# EAGLE board Power (EAGLE 8.4.1), part 1 of 2
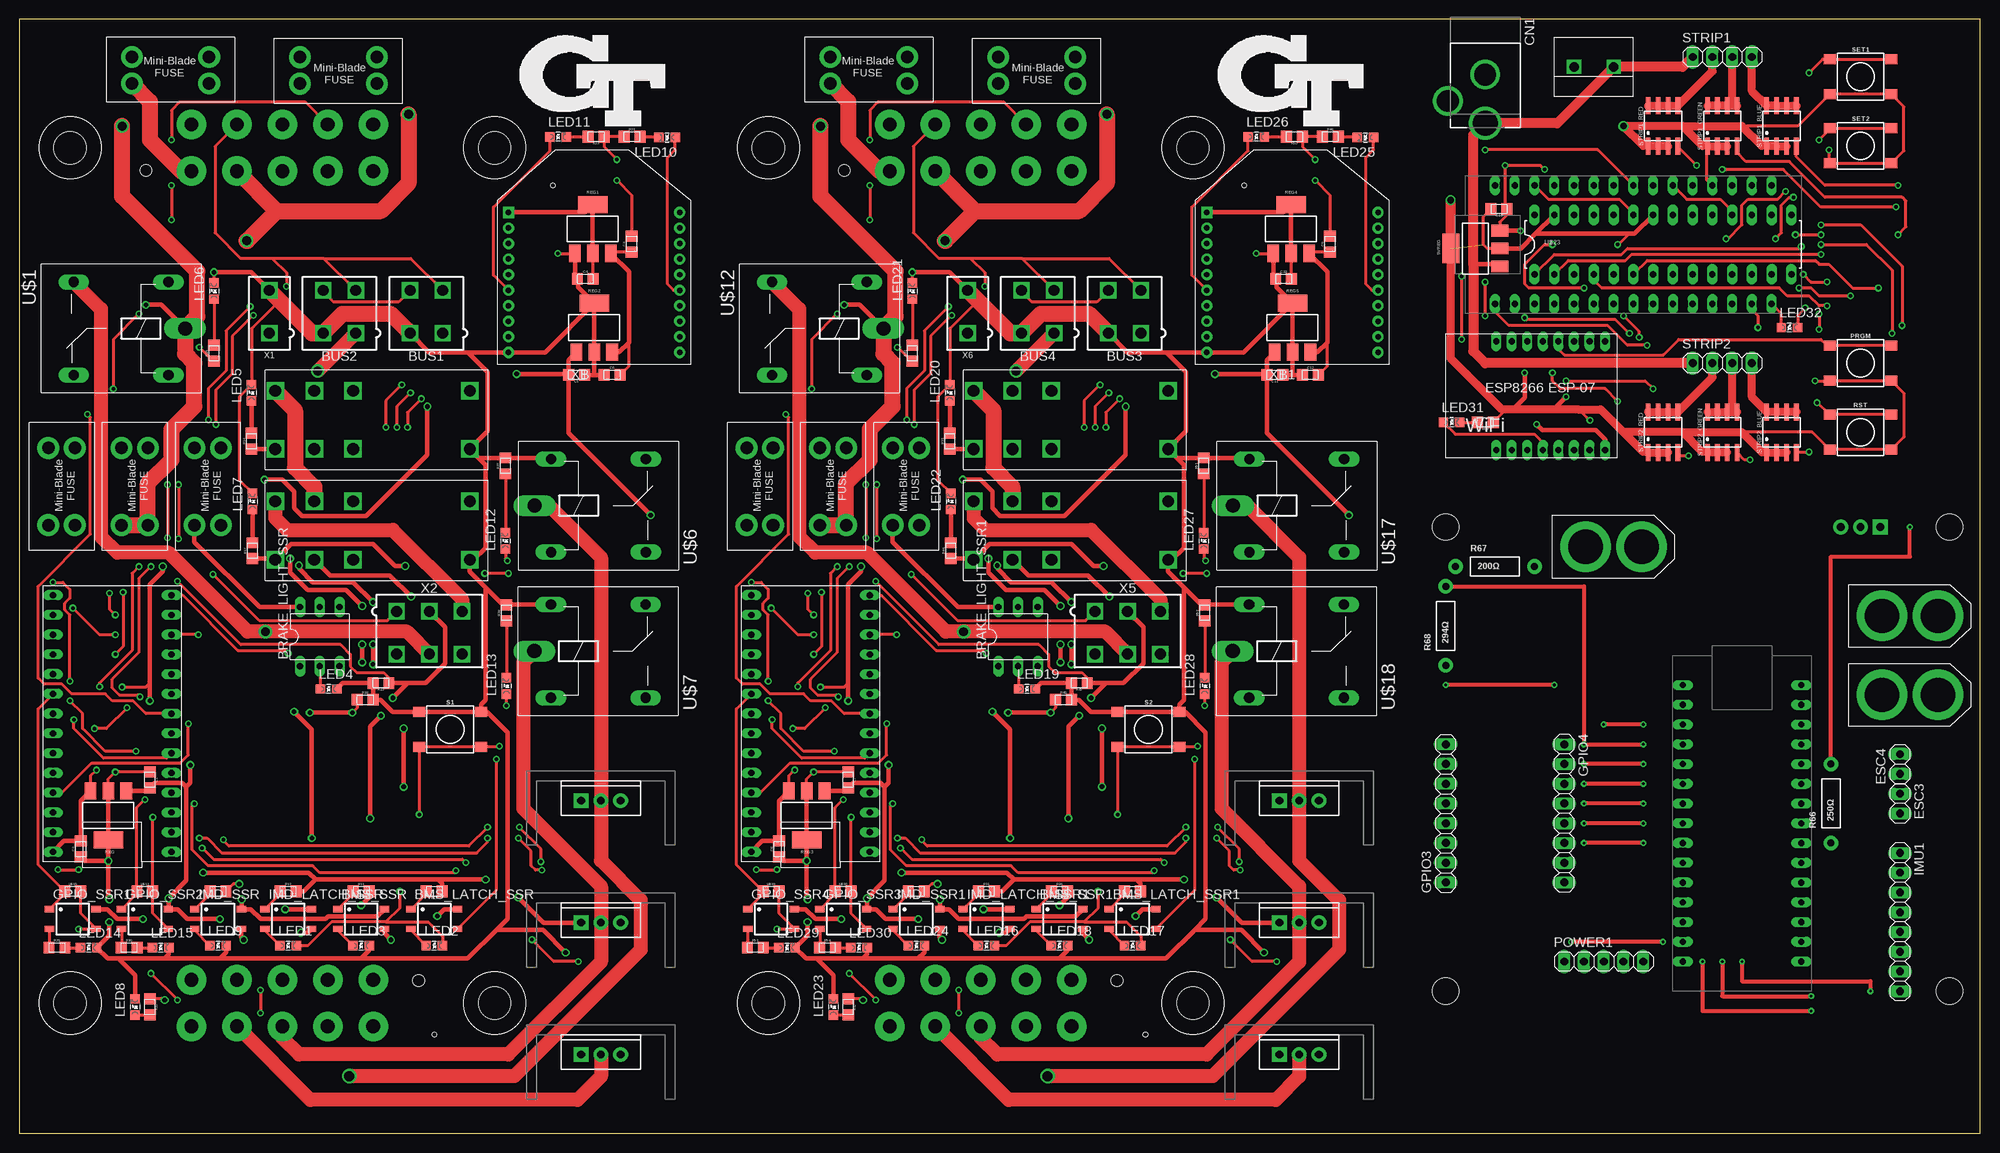
[diagram p0: board, top side]
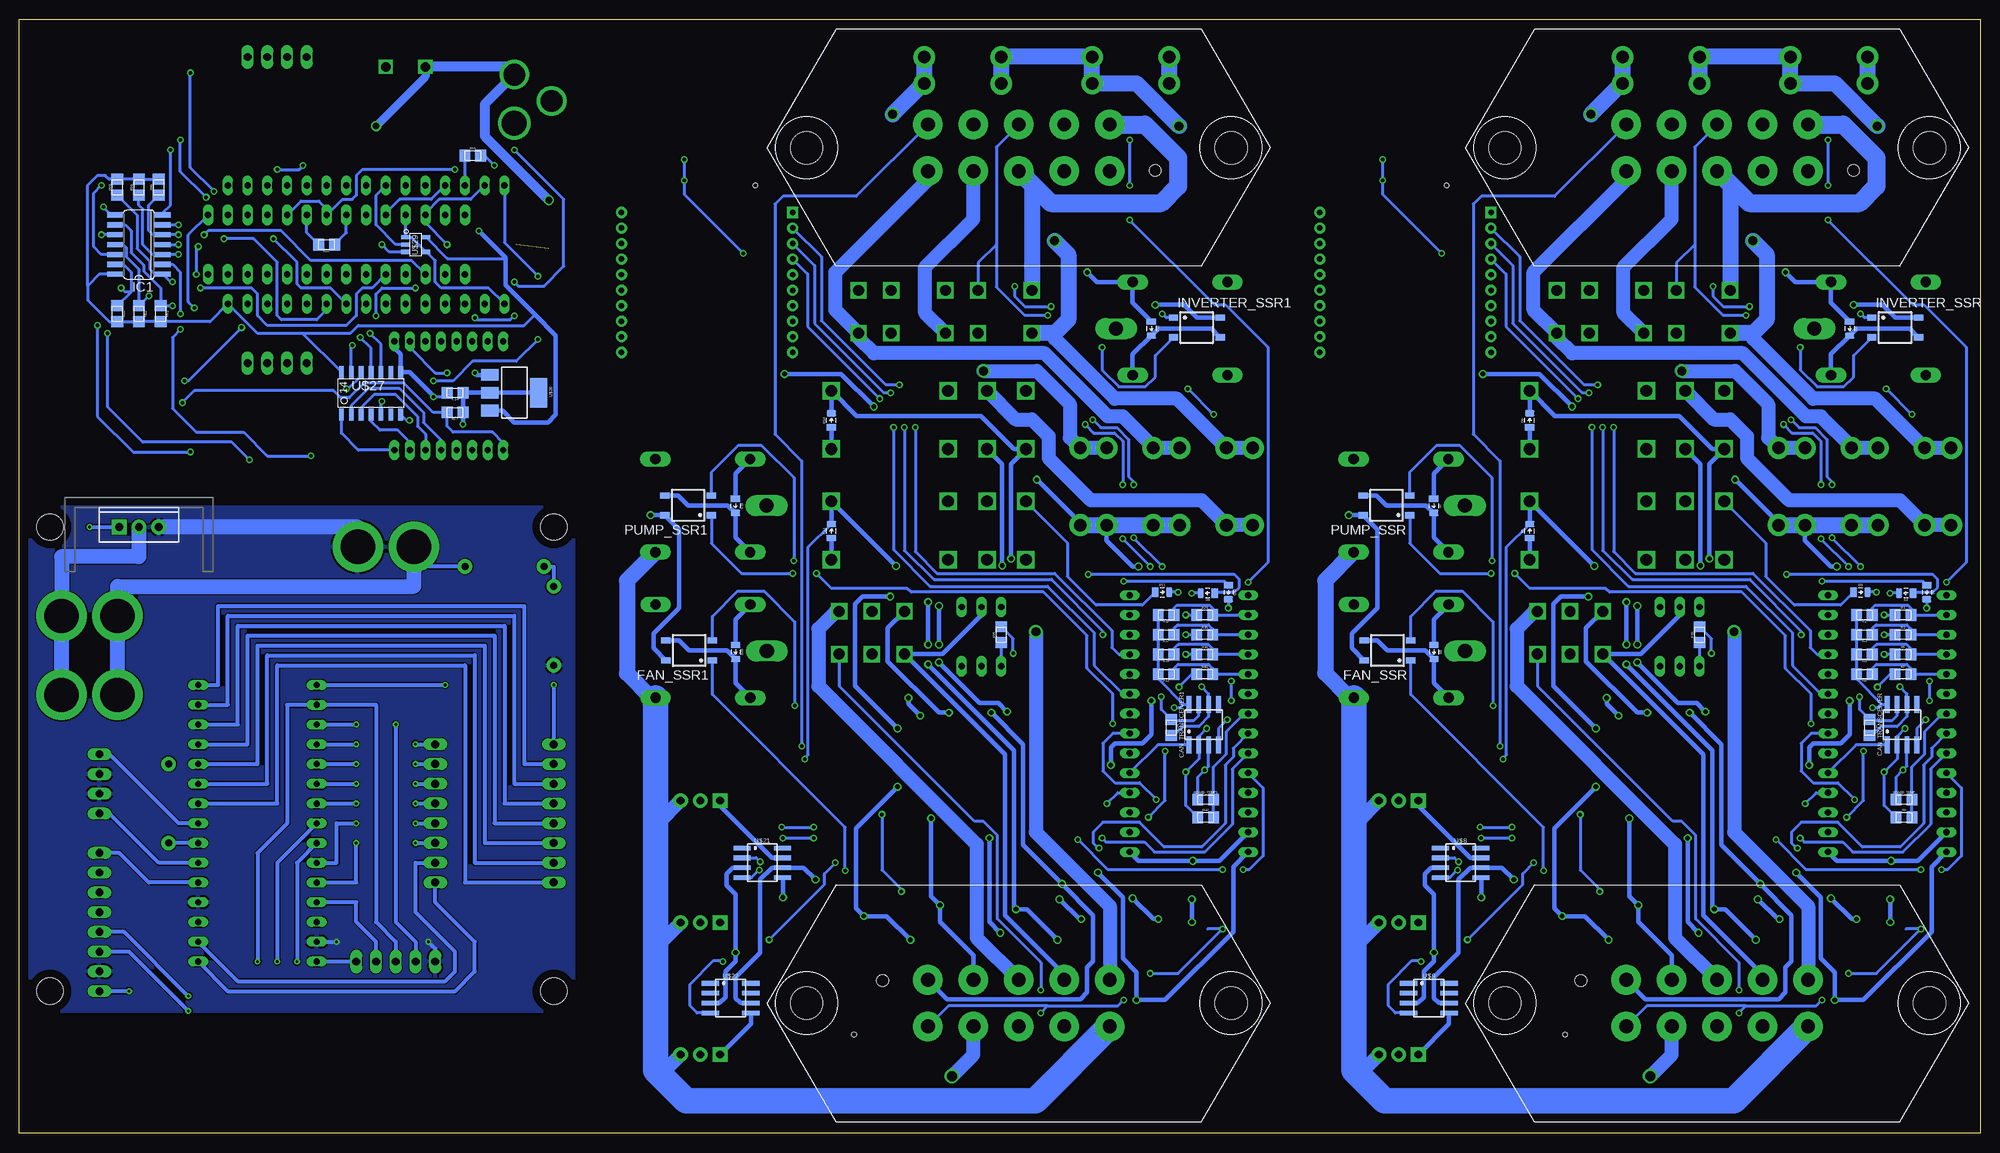
[diagram p1: board, bottom side, seen from below]

Size 252.09 x 143.26 mm. Coordinates in mm from the lower left corner, seen from the top.
Outline: 0,143.26 0,0 252.09,0 252.09,143.26 0,143.26
Copper layers (1*16): Top 0.035mm / dielectric 1.5mm / Bottom 0.035mm
Design rules "default": minimum track width 6mil, minimum drill 0.35mm, track to track 6mil, track to pad 6mil, pad to pad 6mil, via to via 6mil, smd to smd 6mil, copper to edge 40mil, drill to drill 6mil, minimum pad ring 10mil, minimum via ring 8mil, stop-mask expansion 4mil, vias tented up to drill 0mil, thermal gap 10mil
Holes 0.64 mm at 68.58,121.92 157.48,121.92 53.34,12.7 144.78,12.7
Holes 3.4 mm at 248.16,77.98 183.39,77.98 183.39,18.29 248.16,18.29

## Footprints (pad centres in the part's own frame; a part is rotated, then mirrored left to right if it is on the bottom)
SOT223 = smd 1.5 x 2.235: 1 -2.3,-3.15; 2 0,-3.15; 3 2.3,-3.15 | smd 3.8 x 2.2: 4 0,3.15
XT60 = drill 4.4 pad 6.5: + 0,-3.6; - 0,3.6
SOP04 = smd 0.8 x 1.2: 1 -1.27,-3; 2 1.27,-3; 3 1.27,3; 4 -1.27,3
0805 = smd 1.4 x 1.5: 1 -1.025,0; 2 1.025,0
DIL06 = drill 0.813 long: 1 -2.54,-3.81; 2 0,-3.81; 3 2.54,-3.81; 4 2.54,3.81; 5 0,3.81; 6 -2.54,3.81
MINIFIT_5566-4 = drill 1.4 square: 1 2.1,-2.75; 2 -2.1,-2.75; 3 2.1,2.75; 4 -2.1,2.75
SOIC-08 = smd 0.6 x 2.2: 1 -1.905,-2.6; 2 -0.635,-2.6; 3 0.635,-2.6; 4 1.905,-2.6; 5 1.905,2.6; 6 0.635,2.6; 7 -0.635,2.6; 8 -1.905,2.6
DCJACK_2MM_PTH = drill 2.8: GND 0,7.35; GNDBREAK 4.8,10.75 | drill 3.2: PWR 0,13.6
0805_D = smd 0.8 x 1.2: A -0.9,0; C 0.9,0
1X02 = drill 1.016 long: 1 -1.27,0; 2 1.27,0
MINI-BLADE_FUSE_HOLDER = drill 1.613 pad 2.794: L1 0,3.404; L2 0,0; R1 9.906,3.404; R2 9.906,0
1X08 = drill 1.016 long: 1 -8.89,0; 2 -6.35,0; 3 -3.81,0; 4 -1.27,0; 5 1.27,0; 6 3.81,0; 7 6.35,0; 8 8.89,0
SO14 = smd 0.66 x 2.032: 1 -3.81,-3.073; 2 -2.54,-3.073; 3 -1.27,-3.073; 4 0,-3.073; 5 1.27,-3.073; 6 2.54,-3.073; 7 3.81,-3.073; 8 3.81,3.073; 9 2.54,3.073; 10 1.27,3.073; 11 0,3.073; 12 -1.27,3.073; 13 -2.54,3.073; 14 -3.81,3.073
G2RL-2 = drill 1.5 square: 2 10.008,0; 3 5.004,0; 4 0,0; 5 0,7.493; 6 5.004,7.493; 7 10.008,7.493; COIL+ 25.019,0; COIL- 25.019,7.493
LED-805 = smd 1.2 x 1.2: A 0,-1.05; C 0,1.05
1X05 = drill 1.016 long: 1 -5.08,0; 2 -2.54,0; 3 0,0; 4 2.54,0; 5 5.08,0
TO-220-SINK = drill 1 pad 1.88 square: 1 -2.54,0 | drill 1 pad 1.88: 2 0,0; 3 2.54,0
TACTILE_SWITCH_SMD_6.2MM_TALL = smd 1.55 x 1.3: A1 -3.975,-2.25; A2 3.975,-2.25; B1 -3.975,2.25; B2 3.975,2.25
AXIAL-0.4 = drill 0.9 pad 1.88: P$1 -5.08,0; P$2 5.08,0
1X04 = drill 1.016 long: 1 -3.81,0; 2 -1.27,0; 3 1.27,0; 4 3.81,0
ZF112 = drill 1.321 long: 1 4.064,14.884; 2 4.064,2.896; O 16.256,14.884; S 16.256,2.896 | drill 1.803 long: P 1.956,8.89
TEENSY_3.2_SIMPLE = drill 0.8 long: 3.3V 16.51,29.21; A0 16.51,3.81; A1 16.51,6.35; A2 16.51,8.89; A3 16.51,11.43; A4 16.51,13.97; A5 16.51,16.51; A6 16.51,19.05; A7 16.51,21.59; A8 16.51,24.13; A9 16.51,26.67; AGND 16.51,31.75; D0(RX1) 1.27,31.75; D1(TX1) 1.27,29.21; D2 1.27,26.67; D3(CANTX) 1.27,24.13; D4(CANRX) 1.27,21.59; D5 1.27,19.05; D6 1.27,16.51; D7(RX3) 1.27,13.97; D8(TX3) 1.27,11.43; D9(RX2) 1.27,8.89; D10(TX2) 1.27,6.35; D11 1.27,3.81; D12 1.27,1.27; D13 16.51,1.27; GND 1.27,34.29; VIN 16.51,34.29
DIL28-3 = drill 0.813 long: 1 -16.51,-3.81; 2 -13.97,-3.81; 3 -11.43,-3.81; 4 -8.89,-3.81; 5 -6.35,-3.81; 6 -3.81,-3.81; 7 -1.27,-3.81; 8 1.27,-3.81; 9 3.81,-3.81; 10 6.35,-3.81; 11 8.89,-3.81; 12 11.43,-3.81; 13 13.97,-3.81; 14 16.51,-3.81; 15 16.51,3.81; 16 13.97,3.81; 17 11.43,3.81; 18 8.89,3.81; 19 6.35,3.81; 20 3.81,3.81; 21 1.27,3.81; 22 -1.27,3.81; 23 -3.81,3.81; 24 -6.35,3.81; 25 -8.89,3.81; 26 -11.43,3.81; 27 -13.97,3.81; 28 -16.51,3.81
ARDUINO_NANO = drill 0.8 long: 3.3V 1.27,36.83; 5V 1.27,11.43; A0 1.27,31.75; A1 1.27,29.21; A2 1.27,26.67; A3 1.27,24.13; A4 1.27,21.59; A5 1.27,19.05; A6 1.27,16.51; A7 1.27,13.97; AREF 1.27,34.29; D0(RX) 16.51,6.35; D1(TX) 16.51,3.81; D2 16.51,13.97; D3 16.51,16.51; D4 16.51,19.05; D5 16.51,21.59; D6 16.51,24.13; D7 16.51,26.67; D8 16.51,29.21; D9 16.51,31.75; D10 16.51,34.29; D11 16.51,36.83; D12 16.51,39.37; D13 1.27,39.37; GND 1.27,6.35; GND1 16.51,11.43; RST 1.27,8.89; RST1 16.51,8.89; VIN 1.27,3.81
DG301-02P = drill 1.2 square: 1 2.54,3.81; 2 7.62,3.81
ESP8266_ESP-07 = drill 0.8 long: P$1 6.5,-15; P$2 8.5,-15; P$3 10.5,-15; P$4 12.5,-15; P$5 14.5,-15; P$6 16.5,-15; P$7 18.5,-15; P$8 20.5,-15; P$9 20.5,-1; P$10 18.5,-1; P$11 16.5,-1; P$12 14.5,-1; P$13 12.5,-1; P$14 10.5,-1; P$15 8.5,-1; P$16 6.5,-1
SOIC-14 = smd 0.61 x 1.524: 1 -4.445,-2.794; 2 -3.175,-2.794; 3 -1.905,-2.794; 4 -0.635,-2.794; 5 0.635,-2.794; 6 1.905,-2.794; 7 3.175,-2.794; 8 3.175,2.667; 9 1.905,2.667; 10 0.635,2.667; 11 -0.635,2.667; 12 -1.905,2.667; 13 -3.175,2.667; 14 -4.445,2.667
SOT-23-5 = smd 1 x 0.55: 1 -1.35,0.95; 2 -1.35,0; 3 -1.35,-0.95; 4 1.35,-0.95; 5 1.35,0.95
MINIFIT_5566-2 = drill 1.4 square: 1 0,-2.75; 2 0,2.75
MINIFIT_5566-6 = drill 1.4 square: 1 4.2,-2.75; 2 0,-2.75; 3 -4.2,-2.75; 4 4.2,2.75; 5 0,2.75; 6 -4.2,2.75
MX150L_VERTICAL-10 = drill 1.778 pad 3.81: 1 -11.684,2.997; 2 -5.842,2.997; 3 0,2.997; 4 5.842,2.997; 5 11.684,2.997; 6 -11.684,-2.997; 7 -5.842,-2.997; 8 0,-2.997; 9 5.842,-2.997; 10 11.684,-2.997 | hole 4.191: -27.292,0; 27.292,0 | hole 1.524: -17.526,2.921
XBEE = drill 0.7 pad 1.422 square: 1 -11,5.5 | drill 0.7 pad 1.422: 2 -11,3.5; 3 -11,1.5; 4 -11,-0.5; 5 -11,-2.5; 6 -11,-4.5; 7 -11,-6.5; 8 -11,-8.5; 9 -11,-10.5; 10 -11,-12.5; 11 11,-12.5; 12 11,-10.5; 13 11,-8.5; 14 11,-6.5; 15 11,-4.5; 16 11,-2.5; 17 11,-0.5; 18 11,1.5; 19 11,3.5; 20 11,5.5

## Placement (x,y rotation side)
5VREG  [SOT223]  187.2,113.79 90 top
BATTERY_POWER1  XT60  [XT60]  204.98,75.44 270 top
BMS_LATCH_SSR  CPC1002N  [SOP04]  53.34,27.56 270 top
BMS_LATCH_SSR1  CPC1002N  [SOP04]  143.13,27.56 270 top
BMS_SSR  CPC1002N  [SOP04]  43.94,27.56 270 top
BMS_SSR1  CPC1002N  [SOP04]  133.73,27.56 270 top
BOARD_TEMP  THERMISTOR_NCP210805  [0805]  9.78,42.93 0 bottom
BOARD_TEMP1  THERMISTOR_NCP210805  [0805]  99.57,42.93 0 bottom
BRAKE_LIGHT_SSR  SOLID_STATE_RELAY_VO14642AT  [DIL06]  38.61,63.88 0 top
BRAKE_LIGHT_SSR1  SOLID_STATE_RELAY_VO14642AT  [DIL06]  128.4,63.88 0 top
BUS1  CONNECTOR-4  [MINIFIT_5566-4]  52.32,105.66 0 top
BUS2  CONNECTOR-4  [MINIFIT_5566-4]  41.15,105.66 0 top
BUS3  CONNECTOR-4  [MINIFIT_5566-4]  142.11,105.66 0 top
BUS4  CONNECTOR-4  [MINIFIT_5566-4]  130.94,105.66 0 top
C1  .22uF  [0805]  16.76,45.47 270 top
C2  .1uF  [0805]  7.87,36.58 90 top
C3  1uF  [0805]  78.7,114.37 90 top
C4  1uF  [0805]  72.76,109.89 0 top
C5  .22uF  [0805]  71.63,97.54 180 top
C6  .1uF  [0805]  76.2,97.54 0 top
C7  .22uF  [0805]  106.55,45.47 270 top
C8  .1uF  [0805]  97.66,36.58 90 top
C9  1uF  [0805]  168.49,114.37 90 top
C10  1uF  [0805]  162.55,109.89 0 top
C11  .22uF  [0805]  161.42,97.54 180 top
C12  .1uF  [0805]  165.99,97.54 0 top
C13  .1µF  [0805]  190.25,118.87 180 top
C14  1µF  [0805]  196.09,95.25 180 bottom
CAN_TRANSCEIVER  MCP2551  [SOIC-08]  10.03,52.58 0 bottom
CAN_TRANSCEIVER1  MCP2551  [SOIC-08]  99.82,52.58 0 bottom
CN1  [DCJACK_2MM_PTH]  188.47,143.51 180 top
D1  DIODE0805  [0805_D]  9.53,69.47 180 bottom
D2  DIODE0805  [0805_D]  6.86,69.6 270 bottom
D3  DIODE0805  [0805_D]  15.37,69.6 0 bottom
D4  DIODE0805  [0805_D]  16.76,103.5 270 bottom
D5  DIODE0805  [0805_D]  57.91,77.47 90 bottom
D6  DIODE0805  [0805_D]  57.91,91.69 90 bottom
D7  DIODE0805  [0805_D]  70.25,80.7 270 bottom
D8  DIODE0805  [0805_D]  70.22,61.92 270 bottom
D9  DIODE0805  [0805_D]  99.31,69.47 180 bottom
D10  DIODE0805  [0805_D]  96.65,69.6 270 bottom
D11  DIODE0805  [0805_D]  105.16,69.6 0 bottom
D12  DIODE0805  [0805_D]  106.55,103.5 270 bottom
D13  DIODE0805  [0805_D]  147.7,77.47 90 bottom
D14  DIODE0805  [0805_D]  147.7,91.69 90 bottom
D15  DIODE0805  [0805_D]  160.04,80.7 270 bottom
D16  DIODE0805  [0805_D]  160.01,61.92 270 bottom
ESC1_POWER1  XT60  [XT60]  243.08,56.39 270 top
ESC2_POWER1  XT60  [XT60]  243.08,66.55 270 top
ESC3  M02  [1X02]  241.81,42.42 270 top
ESC4  M02  [1X02]  241.81,47.5 90 top
FAN_SSR  CPC1002N  [SOP04]  76.2,62.1 90 bottom
FAN_SSR1  CPC1002N  [SOP04]  165.99,62.1 90 bottom
FH_FUSE  8A  [MINI-BLADE_FUSE_HOLDER]  36.07,135 0 top
FH_FUSE1  8A  [MINI-BLADE_FUSE_HOLDER]  125.86,135 0 top
FSAE_FUSE  8A  [MINI-BLADE_FUSE_HOLDER]  24.38,138.43 180 top
FSAE_FUSE1  8A  [MINI-BLADE_FUSE_HOLDER]  114.17,138.43 180 top
FUSE_BUS_1  5A  [MINI-BLADE_FUSE_HOLDER]  16.51,78.23 90 top
FUSE_BUS_2  5A  [MINI-BLADE_FUSE_HOLDER]  25.91,78.23 90 top
FUSE_BUS_3  5A  [MINI-BLADE_FUSE_HOLDER]  106.3,78.23 90 top
FUSE_BUS_4  5A  [MINI-BLADE_FUSE_HOLDER]  115.7,78.23 90 top
GPIO3  [1X08]  183.39,41.15 90 top
GPIO4  [1X08]  198.63,41.15 270 top
GPIO_SSR1  CPC1002N  [SOP04]  6.86,27.56 270 top
GPIO_SSR2  CPC1002N  [SOP04]  16.13,27.56 270 top
GPIO_SSR3  CPC1002N  [SOP04]  105.92,27.56 270 top
GPIO_SSR4  CPC1002N  [SOP04]  96.65,27.56 270 top
IC1  74HC04D  [SO14]  236.73,114.3 90 bottom
IMD_LATCH_SSR  CPC1002N  [SOP04]  34.54,27.56 270 top
IMD_LATCH_SSR1  CPC1002N  [SOP04]  124.33,27.56 270 top
IMD_SHUTDOWN  G2RL-2-DC12  [G2RL-2]  32.89,88.01 0 top
IMD_SHUTDOWN1  G2RL-2-DC12  [G2RL-2]  32.89,73.79 0 top
IMD_SHUTDOWN2  G2RL-2-DC12  [G2RL-2]  122.68,88.01 0 top
IMD_SHUTDOWN3  G2RL-2-DC12  [G2RL-2]  122.68,73.79 0 top
IMD_SSR  CPC1002N  [SOP04]  25.53,27.56 270 top
IMD_SSR1  CPC1002N  [SOP04]  115.32,27.56 270 top
IMU1  [1X08]  241.81,27.18 270 top
INVERTER_SSR  CPC1002N  [SOP04]  10.92,103.63 270 bottom
INVERTER_SSR1  CPC1002N  [SOP04]  100.71,103.63 270 bottom
LED1  White  [LED-805]  34.54,24.13 270 top
LED2  White  [LED-805]  53.34,24.13 270 top
LED3  Green  [LED-805]  43.94,24.13 270 top
LED4  Red  [LED-805]  39.75,57.15 270 top
LED5  Yellow  [LED-805]  29.84,95.25 0 top
LED6  Red  [LED-805]  25.02,108.33 0 top
LED7  Green  [LED-805]  29.97,81.28 0 top
LED8  Purple  [LED-805]  14.86,16.26 0 top
LED9  Yellow  [LED-805]  25.53,24.13 270 top
LED10  Red  [LED-805]  83.28,128.08 90 top
LED11  Green  [LED-805]  69.25,128.16 270 top
LED12  Red  [LED-805]  62.48,76.2 0 top
LED13  Red  [LED-805]  62.61,57.53 0 top
LED14  Red  [LED-805]  8.89,23.88 270 top
LED15  Red  [LED-805]  18.16,23.88 270 top
LED16  White  [LED-805]  124.33,24.13 270 top
LED17  White  [LED-805]  143.13,24.13 270 top
LED18  Green  [LED-805]  133.73,24.13 270 top
LED19  Red  [LED-805]  129.54,57.15 270 top
LED20  Yellow  [LED-805]  119.63,95.25 0 top
LED21  Red  [LED-805]  114.81,108.33 0 top
LED22  Green  [LED-805]  119.76,81.28 0 top
LED23  Purple  [LED-805]  104.65,16.26 0 top
LED24  Yellow  [LED-805]  115.32,24.13 270 top
LED25  Red  [LED-805]  173.06,128.08 90 top
LED26  Green  [LED-805]  159.04,128.16 270 top
LED27  Red  [LED-805]  152.27,76.2 0 top
LED28  Red  [LED-805]  152.4,57.53 0 top
LED29  Red  [LED-805]  98.68,23.88 270 top
LED30  Red  [LED-805]  107.95,23.88 270 top
LED31  Red  [LED-805]  184.15,91.44 270 top
LED32  [LED-805]  227.58,103.63 270 top
POWER1  [1X05]  203.71,22.1 0 top
POWER_MOSFET1  [TO-220-SINK]  236.73,77.98 0 bottom
PRGM  [TACTILE_SWITCH_SMD_6.2MM_TALL]  236.73,99.06 0 top
PUMP_SSR  CPC1002N  [SOP04]  76.33,80.77 90 bottom
PUMP_SSR1  CPC1002N  [SOP04]  166.12,80.77 90 bottom
R1  43k  [0805]  9.91,66.67 0 bottom
R2  12k  [0805]  14.86,66.67 180 bottom
R3  43k  [0805]  9.91,64.14 0 bottom
R4  12k  [0805]  14.86,64.14 180 bottom
R5  43k  [0805]  9.91,61.59 0 bottom
R6  12k  [0805]  14.86,61.59 180 bottom
R7  43k  [0805]  9.91,59.05 0 bottom
R8  12k  [0805]  14.86,59.05 180 bottom
R9  10k  [0805]  9.78,40.64 0 bottom
R10  43  [0805]  36.07,64.14 90 bottom
R11  43  [0805]  43.94,31.11 0 top
R12  33  [0805]  34.54,31.11 0 top
R13  33  [0805]  53.34,31.11 180 top
R14  820  [0805]  29.84,89.03 90 top
R15  120  [0805]  14.22,52.2 270 bottom
R16  43  [0805]  25.02,100.33 90 top
R17  820  [0805]  29.97,74.93 90 top
R18  2.2k  [0805]  44.45,55.75 0 top
R19  10k  [0805]  46.48,57.91 180 top
R20  270  [0805]  16.76,16.26 270 top
R21  820  [0805]  25.53,31.11 180 top
R22  100  [0805]  78.76,128.18 0 top
R23  33  [0805]  74.15,128.17 180 top
R24  43k  [0805]  99.69,66.67 0 bottom
R25  43  [0805]  125.86,64.14 90 bottom
R26  43  [0805]  133.73,31.11 0 top
R27  33  [0805]  62.48,85.85 90 top
R28  33  [0805]  62.61,66.93 90 top
R29  43  [0805]  4.83,23.88 0 top
R30  43  [0805]  14.1,23.88 0 top
R31  33  [0805]  124.33,31.11 0 top
R32  33  [0805]  143.13,31.11 180 top
R33  820  [0805]  119.63,89.03 90 top
R34  120  [0805]  104.01,52.2 270 bottom
R35  12k  [0805]  104.65,66.67 180 bottom
R36  43k  [0805]  99.69,64.14 0 bottom
R37  12k  [0805]  104.65,64.14 180 bottom
R38  43k  [0805]  99.69,61.59 0 bottom
R39  12k  [0805]  104.65,61.59 180 bottom
R40  43k  [0805]  99.69,59.05 0 bottom
R41  12k  [0805]  104.65,59.05 180 bottom
R42  10k  [0805]  99.57,40.64 0 bottom
R43  43  [0805]  114.81,100.33 90 top
R44  820  [0805]  119.76,74.93 90 top
R45  10k  [0805]  136.27,57.91 180 top
R46  2.2k  [0805]  134.24,55.75 0 top
R47  270  [0805]  106.55,16.26 270 top
R48  820  [0805]  115.32,31.11 180 top
R49  100  [0805]  168.55,128.18 0 top
R50  33  [0805]  163.94,128.17 180 top
R51  33  [0805]  152.27,85.85 90 top
R52  33  [0805]  152.4,66.93 90 top
R53  43  [0805]  94.61,23.88 0 top
R54  43  [0805]  103.89,23.88 0 top
R55  2.2k  [0805]  212.6,114.3 180 bottom
R56  10k  [0805]  193.8,125.73 0 bottom
R57  10k  [0805]  196.09,92.71 180 bottom
R58  10k  [0805]  239.52,121.67 90 bottom
R59  10k  [0805]  236.73,121.67 90 bottom
R60  10k  [0805]  234.19,121.67 90 bottom
R61  10k  [0805]  233.93,105.41 270 bottom
R62  10k  [0805]  236.73,105.41 270 bottom
R63  10k  [0805]  239.52,105.41 270 bottom
R64  100  [0805]  188.47,91.44 180 top
R66  250Ω  [AXIAL-0.4]  232.92,42.42 90 top
R67  200Ω  [AXIAL-0.4]  189.74,72.9 0 top
R68  294Ω  [AXIAL-0.4]  183.39,65.28 90 top
REG  5V  [SOT223]  11.43,40.89 180 top
REG1  TLV1117LV33  [SOT223]  73.72,116.31 0 top
REG2  5V  [SOT223]  73.91,103.63 0 top
REG3  5V  [SOT223]  101.22,40.89 180 top
REG4  TLV1117LV33  [SOT223]  163.51,116.31 0 top
REG5  5V  [SOT223]  163.7,103.63 0 top
RST  [TACTILE_SWITCH_SMD_6.2MM_TALL]  236.73,90.17 0 top
S1  [TACTILE_SWITCH_SMD_6.2MM_TALL]  55.37,51.94 0 top
S2  [TACTILE_SWITCH_SMD_6.2MM_TALL]  145.16,51.94 0 top
SET1  [TACTILE_SWITCH_SMD_6.2MM_TALL]  236.73,135.89 0 top
SET2  [TACTILE_SWITCH_SMD_6.2MM_TALL]  236.73,127 0 top
SHUTDWN_FUSE  5A  [MINI-BLADE_FUSE_HOLDER]  7.11,78.23 90 top
SHUTDWN_FUSE1  5A  [MINI-BLADE_FUSE_HOLDER]  96.9,78.23 90 top
STRIP1  [1X04]  218.95,138.43 0 top
STRIP1_BLUE  MDS1656  [SOIC-08]  226.57,129.54 0 top
STRIP1_GREEN  MDS1656  [SOIC-08]  218.95,129.54 0 top
STRIP1_RED  MDS1656  [SOIC-08]  211.33,129.54 0 top
STRIP2  [1X04]  218.95,99.06 0 top
STRIP2_BLUE  MDS1656  [SOIC-08]  226.57,90.17 0 top
STRIP2_GREEN  MDS1656  [SOIC-08]  218.95,90.17 0 top
STRIP2_RED  MDS1656  [SOIC-08]  211.33,90.17 0 top
U$1  G5LE  [ZF112]  23.24,112.39 180 top
U$2  N-CHANNEL_MOSFETGENERIC  [TO-220-SINK]  74.76,42.79 0 top
U$3  TEENSY_3.2_SIMPLE  [TEENSY_3.2_SIMPLE]  20.83,70.48 180 top
U$4  N-CHANNEL_MOSFETGENERIC  [TO-220-SINK]  74.76,27.09 0 top
U$5  N-CHANNEL_MOSFETGENERIC  [TO-220-SINK]  74.76,10.13 0 top
U$6  G5LE  [ZF112]  64.29,71.85 0 top
U$7  G5LE  [ZF112]  64.25,53.13 0 top
U$8  MC34152  [SOIC-08]  66.8,34.8 270 bottom
U$9  MC34152  [SOIC-08]  70.87,17.4 270 bottom
U$10  JUMPER  [0805]  6.86,31.11 0 top
U$11  JUMPER  [0805]  16.13,31.11 0 top
U$12  G5LE  [ZF112]  113.03,112.39 180 top
U$13  TEENSY_3.2_SIMPLE  [TEENSY_3.2_SIMPLE]  110.62,70.48 180 top
U$14  N-CHANNEL_MOSFETGENERIC  [TO-220-SINK]  164.55,42.79 0 top
U$15  N-CHANNEL_MOSFETGENERIC  [TO-220-SINK]  164.55,27.09 0 top
U$16  N-CHANNEL_MOSFETGENERIC  [TO-220-SINK]  164.55,10.13 0 top
U$17  G5LE  [ZF112]  154.07,71.85 0 top
U$18  G5LE  [ZF112]  154.04,53.13 0 top
U$19  JUMPER  [0805]  96.65,31.11 0 top
U$20  JUMPER  [0805]  105.92,31.11 0 top
U$21  MC34152  [SOIC-08]  156.59,34.8 270 bottom
U$22  MC34152  [SOIC-08]  160.66,17.4 270 bottom
U$23  TLC5940  [DIL28-3]  211.33,114.3 0 top
U$24  ARDUINO_NANO  [ARDUINO_NANO]  229.11,105.41 90 top
U$25  TERMINAL_BLOCK_DG301-02P  [DG301-02P]  207.52,140.97 180 top
U$26  ESP8266_ESP-07  [ESP8266_ESP-07]  183.39,102.87 0 top
U$27  [SOIC-14]  206.25,95.25 0 bottom
U$28  TLV1117LV33  [SOT223]  188.47,95.25 270 bottom
U$29  SN74LVC1G08  [SOT-23-5]  201.17,114.3 0 bottom
U$31  ARDUINO_NANO  [ARDUINO_NANO]  212.6,18.29 0 top
X1  CONNECTOR-2  [MINIFIT_5566-2]  32.13,105.66 0 top
X2  CONNECTOR-6  [MINIFIT_5566-6]  52.7,64.39 180 top
X3  CONNECTOR-10MX150L_VERTICAL-10  [MX150L_VERTICAL-10]  33.81,16.75 0 bottom
X4  CONNECTOR-10MX150L_VERTICAL-10  [MX150L_VERTICAL-10]  33.81,126.75 180 bottom
X5  CONNECTOR-6  [MINIFIT_5566-6]  142.49,64.39 180 top
X6  CONNECTOR-2  [MINIFIT_5566-2]  121.92,105.66 0 top
X7  CONNECTOR-10MX150L_VERTICAL-10  [MX150L_VERTICAL-10]  123.6,16.75 0 bottom
X8  CONNECTOR-10MX150L_VERTICAL-10  [MX150L_VERTICAL-10]  123.6,126.75 180 bottom
XB  XBEE  [XBEE]  73.89,112.94 0 top
XB1  XBEE  [XBEE]  163.68,112.94 0 top

## Library data of the parts
5VREG BMS_LATCH_SSR BMS_LATCH_SSR1 BMS_SSR BMS_SSR1 BOARD_TEMP BOARD_TEMP1 BRAKE_LIGHT_SSR BRAKE_LIGHT_SSR1 C1-C14 CAN_TRANSCEIVER CAN_TRANSCEIVER1 CN1 D1-D16 FAN_SSR FAN_SSR1 FH_FUSE FH_FUSE1 FSAE_FUSE FSAE_FUSE1 FUSE_BUS_1-FUSE_BUS_4 GPIO_SSR1-GPIO_SSR4 IMD_LATCH_SSR IMD_LATCH_SSR1 IMD_SHUTDOWN IMD_SHUTDOWN1-IMD_SHUTDOWN3 IMD_SSR IMD_SSR1 INVERTER_SSR INVERTER_SSR1 LED1-LED32 PRGM PUMP_SSR PUMP_SSR1 R1-R64 REG REG1-REG5 RST S1 S2 SET1 SET2 SHUTDWN_FUSE SHUTDWN_FUSE1 STRIP1 STRIP1_BLUE STRIP1_GREEN STRIP1_RED STRIP2 STRIP2_BLUE STRIP2_GREEN STRIP2_RED U$1 U$3 U$6-U$13 U$17-U$29 X3 X4 X7 X8 XB XB1 = HyTechDevices
BATTERY_POWER1 ESC1_POWER1 ESC2_POWER1 ESC3 ESC4 GPIO3 GPIO4 IMU1 POWER1 R66-R68 U$31 = Controls Library
BUS1-BUS4 = HyTechDevices; OC_FARNELL: unknown; OC_NEWARK: unknown
IC1 = 74xx-eu; SPICEPREFIX: I
POWER_MOSFET1 = Controls Library; _EXTERNAL_: 1
U$2 U$4 U$5 U$14-U$16 = HyTechDevices; _EXTERNAL_: 1
X1 X6 = HyTechDevices; OC_FARNELL: 1822072; OC_NEWARK: unknown
X2 X5 = HyTechDevices; MPN: 95566-61002; OC_FARNELL: unknown; OC_NEWARK: 22K8620

## Nets
3.3V1: IMU1.8 POWER1.3 U$31.3.3V
5V1: POWER1.4 U$31.5V
12V_F1: BUS1.1 FUSE_BUS_1.R1 FUSE_BUS_1.R2 X4.5
12V_F2: BUS2.1 FUSE_BUS_2.R1 FUSE_BUS_2.R2 X4.4
12V_F3: BUS3.1 FUSE_BUS_3.R1 FUSE_BUS_3.R2 X8.5
12V_F4: BUS4.1 FUSE_BUS_4.R1 FUSE_BUS_4.R2 X8.4
12VSUPPLY_BRB: FH_FUSE.R1 FH_FUSE.R2 SHUTDWN_FUSE.R1 SHUTDWN_FUSE.R2 X1.1 X4.2
12VSUPPLY_BRB1: FH_FUSE1.R1 FH_FUSE1.R2 SHUTDWN_FUSE1.R1 SHUTDWN_FUSE1.R2 X6.1 X8.2
12VSUPPLY_FSAE: FSAE_FUSE.R1 FSAE_FUSE.R2 X4.1
12VSUPPLY_FSAE1: FSAE_FUSE1.R1 FSAE_FUSE1.R2 X8.1
12VSUPPLY_READ: R7.2 R8.1 U$3.A3
12VSUPPLY_READ1: R40.2 R41.1 U$13.A3
+3V3: C14.1 R57.1 U$26.P$8 U$27.1 U$28.2 U$28.4
+5V: BOARD_TEMP.1 C2.2 CAN_TRANSCEIVER.3 R12.2 R13.1 R20.1 REG.3 U$3.VIN U$8.6 U$9.6
+5V1: BOARD_TEMP1.1 C8.2 CAN_TRANSCEIVER1.3 R31.2 R32.1 R47.1 REG3.3 U$13.VIN U$21.6 U$22.6
+5V2: 5VREG.3 C13.1 IC1.14 LED32.A R56.2 R58.2 R59.2 R60.2 R61.2 R62.2 R63.2 U$23.19 U$23.21 U$24.VIN U$27.14 U$28.3 U$29.5
+12V: BMS_SSR.4 BRAKE_LIGHT_SSR.6 C1.2 C5.2 FAN_SSR.4 FH_FUSE.L1 FH_FUSE.L2 FSAE_FUSE.L1 FSAE_FUSE.L2 FUSE_BUS_1.L1 FUSE_BUS_1.L2 FUSE_BUS_2.L1 FUSE_BUS_2.L2 GPIO_SSR1.4 GPIO_SSR2.4 IMD_SSR.4 INVERTER_SSR.4 PUMP_SSR.4 R7.1 REG2.1 REG.1 U$1.P
+12V1: BMS_SSR1.4 BRAKE_LIGHT_SSR1.6 C7.2 C11.2 FAN_SSR1.4 FH_FUSE1.L1 FH_FUSE1.L2 FSAE_FUSE1.L1 FSAE_FUSE1.L2 FUSE_BUS_3.L1 FUSE_BUS_3.L2 FUSE_BUS_4.L1 FUSE_BUS_4.L2 GPIO_SSR3.4 GPIO_SSR4.4 IMD_SSR1.4 INVERTER_SSR1.4 PUMP_SSR1.4 R40.1 REG3.1 REG5.1 U$12.P
+12V2: 5VREG.1 CN1.PWR STRIP1.1 STRIP2.1 U$25.1
A4: GPIO4.1 R67.P$1 R68.P$2 U$31.A0
A5: GPIO4.2 U$31.A1
A8: GPIO4.3 U$31.A2
A9: GPIO4.4 U$31.A3
A10: GPIO4.5 U$31.A6
A11: GPIO4.6 U$31.A7
AREF1: POWER1.2 U$31.AREF
BLANK: R56.1 U$23.23 U$24.D10
BMS_COIL_PWR: BMS_LATCH_SSR.3 D5.C IMD_SHUTDOWN1.4 IMD_SHUTDOWN1.COIL- R17.1
BMS_COIL_PWR1: BMS_LATCH_SSR1.3 D13.C IMD_SHUTDOWN3.4 IMD_SHUTDOWN3.COIL- R44.1
BMS_OK: D2.A R11.2 R19.1 X2.2 X3.2
BMS_OK1: D10.A R26.2 R45.1 X5.2 X7.2
BMS_OK_READ: R3.2 R4.1 U$3.A1
BMS_OK_READ1: R36.2 R37.1 U$13.A1
BMS_PWR_STEP: BMS_LATCH_SSR.4 BMS_SSR.3 IMD_SHUTDOWN1.3
BMS_PWR_STEP1: BMS_LATCH_SSR1.4 BMS_SSR1.3 IMD_SHUTDOWN3.3
BRAKE_LIGHT: BRAKE_LIGHT_SSR.5 X2.4 X3.4
BRAKE_LIGHT1: BRAKE_LIGHT_SSR1.5 X5.4 X7.4
BRAKE_LIGHT_CTRL: R10.2 U$3.D12
BRAKE_LIGHT_CTRL1: R25.2 U$13.D12
CANH: BUS1.4 BUS2.4 CAN_TRANSCEIVER.7 R15.1 X4.8
CANH1: BUS3.4 BUS4.4 CAN_TRANSCEIVER1.7 R34.1 X8.8
CANL: BUS1.3 BUS2.3 CAN_TRANSCEIVER.6 R15.2 X4.7
CANL1: BUS3.3 BUS4.3 CAN_TRANSCEIVER1.6 R34.2 X8.7
D0(RX)1: GPIO4.7 U$31.D0(RX)
D1: GPIO3.8 U$31.D13
D1(TX)1: GPIO4.8 U$31.D1(TX)
D2: GPIO3.7 U$31.D12
D3: GPIO3.6 U$31.D11
D4: GPIO3.5 U$31.D10
D5: GPIO3.4 U$31.D9
D14: GPIO3.3 U$31.D8
D15: GPIO3.2 U$31.D7
D16: GPIO3.1 U$31.D6
DRIVE1: R66.P$1 U$31.D4
ESC3: ESC3.2 U$31.D3
ESC4: ESC4.2 U$31.D5
FAN1-: U$4.2 U$7.P X3.8
FAN1-1: U$15.2 U$18.P X7.8
FAN2-: U$5.2 X3.9
FAN2-1: U$16.2 X7.9
GND: BUS1.2 BUS2.2 C1.1 C2.1 C3.2 C4.1 C5.1 C6.1 CAN_TRANSCEIVER.2 CAN_TRANSCEIVER.8 D4.A D5.A D6.A D7.A D8.A IMD_SHUTDOWN1.COIL+ IMD_SHUTDOWN.COIL+ LED3.C LED4.C LED5.C LED6.C LED7.C LED8.C LED9.C LED14.C LED15.C R2.2 R4.2 R6.2 R8.2 R9.1 R18.2 R19.2 R22.1 R23.1 R27.2 R28.2 REG1.1 REG2.2 REG2.4 REG.2 REG.4 S1.B1 S1.B2 U$1.2 U$3.AGND U$3.GND U$6.1 U$7.1 U$8.3 U$9.3 X1.2 X4.3 X4.6 XB.10
GND1: U$2.3 U$4.3 U$5.3 U$6.S U$7.S X3.10
GND2: BUS3.2 BUS4.2 C7.1 C8.1 C9.2 C10.1 C11.1 C12.1 CAN_TRANSCEIVER1.2 CAN_TRANSCEIVER1.8 D12.A D13.A D14.A D15.A D16.A IMD_SHUTDOWN2.COIL+ IMD_SHUTDOWN3.COIL+ LED18.C LED19.C LED20.C LED21.C LED22.C LED23.C LED24.C LED29.C LED30.C R35.2 R37.2 R39.2 R41.2 R42.1 R45.2 R46.2 R49.1 R50.1 R51.2 R52.2 REG3.2 REG3.4 REG4.1 REG5.2 REG5.4 S2.B1 S2.B2 U$12.2 U$13.AGND U$13.GND U$17.1 U$18.1 U$21.3 U$22.3 X6.2 X8.3 X8.6 XB1.10
GND3: U$14.3 U$15.3 U$16.3 U$17.S U$18.S X7.10
GND4: 5VREG.2 5VREG.4 C13.2 C14.2 CN1.GND IC1.7 PRGM.A1 PRGM.A2 R55.1 R64.1 RST.A1 RST.A2 SET1.A1 SET1.A2 SET2.A1 SET2.A2 STRIP1_BLUE.1 STRIP1_BLUE.2 STRIP1_BLUE.3 STRIP1_GREEN.1 STRIP1_GREEN.2 STRIP1_GREEN.3 STRIP1_RED.1 STRIP1_RED.2 STRIP1_RED.3 STRIP2_BLUE.1 STRIP2_BLUE.2 STRIP2_BLUE.3 STRIP2_GREEN.1 STRIP2_GREEN.2 STRIP2_GREEN.3 STRIP2_RED.1 STRIP2_RED.2 STRIP2_RED.3 U$23.22 U$23.27 U$24.GND U$24.GND1 U$25.2 U$26.P$9 U$27.7 U$27.8 U$28.1 U$29.3
GND6: BATTERY_POWER1.- ESC3.1 ESC4.1 IMU1.7 POWER1.1 POWER_MOSFET1.3 R68.P$1 U$31.GND U$31.GND1
GNDBREAK: CN1.GNDBREAK
GPIO_1: GPIO_SSR1.3 U$10.2 X2.6 X3.6
GPIO_2: GPIO_SSR2.3 U$11.2 X4.9
GPIO_3: GPIO_SSR3.3 U$20.2 X8.9
GPIO_4: GPIO_SSR4.3 U$19.2 X5.6 X7.6
GPIO_CTRL1: GPIO_SSR1.1 U$3.A4 U$10.1
GPIO_CTRL2: GPIO_SSR2.1 U$3.D5 U$11.1
GPIO_CTRL3: U$3.D13
GPIO_CTRL4: GPIO_SSR3.1 U$13.D5 U$20.1
GPIO_CTRL5: U$13.D13
GPIO_CTRL6: GPIO_SSR4.1 U$13.A4 U$19.1
IMD_COIL_PWR: D6.C IMD_LATCH_SSR.3 IMD_SHUTDOWN.4 IMD_SHUTDOWN.COIL- R14.1
IMD_COIL_PWR1: D14.C IMD_LATCH_SSR1.3 IMD_SHUTDOWN2.4 IMD_SHUTDOWN2.COIL- R33.1
IMD_PWR_STEP: IMD_LATCH_SSR.4 IMD_SHUTDOWN.3 IMD_SSR.3
IMD_PWR_STEP1: IMD_LATCH_SSR1.4 IMD_SHUTDOWN2.3 IMD_SSR1.3
INT1: IMU1.1 U$31.D2
INVERTER_CTRL: INVERTER_SSR.1 U$3.D6
INVERTER_CTRL1: INVERTER_SSR1.1 U$13.D6
INVERTER_SUPPLY: U$1.S X2.5 X3.5
INVERTER_SUPPLY1: U$12.S X5.5 X7.5
LATCH_EXT_BUTTON: LED1.C LED2.C S1.A1 S1.A2 X4.10
LATCH_EXT_BUTTON1: LED16.C LED17.C S2.A1 S2.A2 X8.10
MISO: U$24.D12 U$27.12
MISO_33: U$26.P$6 U$27.3
MOSI: U$23.26 U$24.D11 U$27.11
MOSI_33: U$26.P$7 U$27.4
N$1: IMD_LATCH_SSR.2 LED1.A
N$2: CAN_TRANSCEIVER.4 U$3.D4(CANRX)
N$3: CAN_TRANSCEIVER.1 U$3.D3(CANTX)
N$4: D7.C PUMP_SSR.3 U$6.2
N$5: IMD_LATCH_SSR.1 R12.1
N$6: GPIO_SSR1.2 R29.1
N$7: BRAKE_LIGHT_SSR.2 LED4.A
N$8: GPIO_SSR2.2 R30.1
N$9: BMS_SSR.2 LED3.A
N$10: LED10.A XB.15
N$11: LED10.C R22.2
N$12: BMS_LATCH_SSR.1 R13.2
N$13: LED14.A R29.2
N$14: LED15.A R30.2
N$15: BOARD_TEMP.2 R9.2 U$3.A5
N$16: BMS_LATCH_SSR.2 LED2.A
N$17: BRAKE_LIGHT_SSR.1 R10.1
N$18: BMS_SSR.1 R11.1
N$19: LED5.A R14.2
N$20: D8.C FAN_SSR.3 U$7.2
N$21: CAN_TRANSCEIVER1.4 U$13.D4(CANRX)
N$22: D1.C R1.1
N$23: D2.C R3.1
N$24: D3.C R5.1
N$25: LED11.A XB.6
N$26: D4.C INVERTER_SSR.3 U$1.1
N$27: INVERTER_SSR.2 R16.1
N$28: LED6.A R16.2
N$29: LED8.A R20.2
N$30: CAN_TRANSCEIVER1.1 U$13.D3(CANTX)
N$31: IMD_SSR.1 R21.2
N$32: LED7.A R17.2
N$33: LED11.C R23.2
N$34: IMD_SSR.2 LED9.A
N$35: C3.1 C6.2 REG1.3 REG2.3
N$36: LED13.C R28.1
N$37: LED12.C R27.1
N$38: LED12.A PUMP_SSR.2
N$39: U$2.1 U$8.7
N$40: U$4.1 U$8.5
N$41: U$5.1 U$9.5
N$42: FAN_SSR.2 LED13.A
N$43: BOARD_TEMP1.2 R42.2 U$13.A5
N$44: IMD_LATCH_SSR1.2 LED16.A
N$45: BMS_SSR1.2 LED18.A
N$46: BMS_SSR1.1 R26.1
N$47: BRAKE_LIGHT_SSR1.2 LED19.A
N$48: BRAKE_LIGHT_SSR1.1 R25.1
N$49: LED20.A R33.2
N$50: D9.C R24.1
N$51: D10.C R36.1
N$52: D11.C R38.1
N$53: D12.C INVERTER_SSR1.3 U$12.1
N$54: INVERTER_SSR1.2 R43.1
N$55: LED21.A R43.2
N$56: IMD_LATCH_SSR1.1 R31.1
N$57: BMS_LATCH_SSR1.2 LED17.A
N$58: BMS_LATCH_SSR1.1 R32.2
N$59: LED22.A R44.2
N$60: LED23.A R47.2
N$61: IMD_SSR1.2 LED24.A
N$62: IMD_SSR1.1 R48.2
N$63: LED25.A XB1.15
N$64: LED25.C R49.2
N$65: LED26.C R50.2
N$66: LED26.A XB1.6
N$67: C9.1 C12.2 REG4.3 REG5.3
N$68: U$14.1 U$21.7
N$69: U$15.1 U$21.5
N$70: U$16.1 U$22.5
N$71: D15.C PUMP_SSR1.3 U$17.2
N$72: D16.C FAN_SSR1.3 U$18.2
N$73: LED28.C R52.1
N$74: LED27.C R51.1
N$75: LED27.A PUMP_SSR1.2
N$76: FAN_SSR1.2 LED28.A
N$77: GPIO_SSR4.2 R53.1
N$78: GPIO_SSR3.2 R54.1
N$79: LED29.A R53.2
N$80: LED30.A R54.2
N$81: R55.2 U$23.20
N$82: U$23.18 U$24.D3
N$83: STRIP2.2 STRIP2_RED.5 STRIP2_RED.6 STRIP2_RED.7 STRIP2_RED.8
N$84: STRIP1.2 STRIP1_RED.5 STRIP1_RED.6 STRIP1_RED.7 STRIP1_RED.8
N$85: STRIP1.3 STRIP1_GREEN.5 STRIP1_GREEN.6 STRIP1_GREEN.7 STRIP1_GREEN.8
N$86: STRIP1.4 STRIP1_BLUE.5 STRIP1_BLUE.6 STRIP1_BLUE.7 STRIP1_BLUE.8
N$87: STRIP2.3 STRIP2_GREEN.5 STRIP2_GREEN.6 STRIP2_GREEN.7 STRIP2_GREEN.8
N$88: STRIP2.4 STRIP2_BLUE.5 STRIP2_BLUE.6 STRIP2_BLUE.7 STRIP2_BLUE.8
N$89: R57.2 RST.B1 RST.B2 U$26.P$1
N$90: IC1.2 STRIP2_RED.4
N$91: IC1.4 STRIP2_GREEN.4
N$92: IC1.8 STRIP1_RED.4
N$93: IC1.10 STRIP1_GREEN.4
N$94: IC1.12 STRIP1_BLUE.4
N$95: IC1.6 STRIP2_BLUE.4
N$96: IC1.1 R58.1 U$23.1
N$97: IC1.3 R59.1 U$23.2
N$98: IC1.5 R60.1 U$23.3
N$99: IC1.13 R63.1 U$23.6
N$100: IC1.11 R62.1 U$23.5
N$101: IC1.9 R61.1 U$23.4
N$102: PRGM.B1 PRGM.B2 U$26.P$12
N$103: LED31.A U$26.P$4
N$104: LED32.C U$23.15
N$105: LED31.C R64.2
N$107: POWER_MOSFET1.1 R66.P$2
OKHS: D1.A R18.1 R21.1 X2.1 X3.1
OKHS1: D9.A R46.1 R48.1 X5.1 X7.1
OKHS_READ: R1.2 R2.1 U$3.A0
OKHS_READ1: R24.2 R35.1 U$13.A0
PUMP1-: U$2.2 U$6.P X3.7
PUMP1-1: U$14.2 U$17.P X7.7
PWM_CTRL1: U$3.A8 U$8.2
PWM_CTRL2: U$3.A7 U$8.4
PWM_CTRL3: U$3.A6 U$9.4
PWM_CTRL4: U$13.A6 U$22.4
PWM_CTRL5: U$13.A7 U$21.4
PWM_CTRL6: U$13.A8 U$21.2
RELAY_CTRL1: PUMP_SSR.1 U$3.A9
RELAY_CTRL2: FAN_SSR.1 U$3.D2
RELAY_CTRL3: FAN_SSR1.1 U$13.D2
RELAY_CTRL4: PUMP_SSR1.1 U$13.A9
SCK: U$23.25 U$24.D13 U$27.13 U$29.1 U$29.4
SCK_33: U$26.P$5 U$27.2
SCL1: IMU1.6 U$31.A5
SDA1: IMU1.5 U$31.A4
SET1: SET1.B1 SET1.B2 U$24.A5
SET2: SET2.B1 SET2.B2 U$24.A6
SHUTDOWN_A: IMD_SHUTDOWN.6 SHUTDWN_FUSE.L1 SHUTDWN_FUSE.L2
SHUTDOWN_A1: IMD_SHUTDOWN2.6 SHUTDWN_FUSE1.L1 SHUTDWN_FUSE1.L2
SHUTDOWN_B: IMD_SHUTDOWN1.6 IMD_SHUTDOWN.5
SHUTDOWN_B1: IMD_SHUTDOWN2.5 IMD_SHUTDOWN3.6
SHUTDOWN_C: D3.A IMD_SHUTDOWN1.5 X2.3 X3.3
SHUTDOWN_C1: D11.A IMD_SHUTDOWN3.5 X5.3 X7.3
SHUTDOWN_OUT_READ: R5.2 R6.1 U$3.A2
SHUTDOWN_OUT_READ1: R38.2 R39.1 U$13.A2
SS_ESP8266: U$24.D5 U$27.10
SS_ESP8266_33: U$26.P$10 U$27.5
SS_TLC5940: U$24.D6 U$29.2
SUPPLY+1: BATTERY_POWER1.+ ESC1_POWER1.+ ESC2_POWER1.+ R67.P$2
SUPPLY-1: ESC1_POWER1.- ESC2_POWER1.- POWER_MOSFET1.2
VCC: C4.2 REG1.2 REG1.4 XB.1
VCC1: C10.2 REG4.2 REG4.4 XB1.1
VIN1: POWER1.5 U$31.VIN
XB1: U$13.D7(RX3) XB1.4
XB8: U$3.D7(RX3) XB.4
XBDI: U$3.D10(TX2) XB.3
XBDI1: U$13.D10(TX2) XB1.3
XBDO: U$3.D9(RX2) XB.2
XBDO1: U$13.D9(RX2) XB1.2
XLAT: U$23.24 U$24.D9

## Tracks (layer width: path | path; a pad name or v marks a point on that pad's centre or on a via)
3.3V1  (via drill 0.35)
  Top 0.508: v221.49,22.1 221.49,19.56 238,19.56 v238,18.29
  Bottom 0.508: POWER1.3 203.71,24.64 206.25,27.18 206.25,55.12 U$31.3.3V 217.68,55.12 217.68,39.88 221.49,36.07 v221.49,22.1 | v238,18.29 IMU1.8
5V1
  Bottom 0.508: POWER1.4 206.25,24.64 208.79,27.18 208.79,29.72 U$31.5V
12V_F1
  Bottom 1.778: X4.5 45.49,122.65 57.4,110.74 57.4,105.89 BUS1.1 54.42,102.3 52.45,100.33 30.48,100.33 22.35,92.2 20.45,92.2 16.51,88.27 FUSE_BUS_1.R2 FUSE_BUS_1.R1
12V_F2  (via drill 1.14)
  Top 1.778: BUS2.1 38.38,98.04 v38.35,98.04
  Bottom 1.778: BUS2.1 45.85,105.51 45.85,111.38 39.65,117.57 X4.4 | FUSE_BUS_2.R1 FUSE_BUS_2.R2 27.24,89.47 27.24,93.79 31.5,98.04 v38.35,98.04
12V_F3
  Bottom 1.778: X8.5 135.28,122.65 147.19,110.74 147.19,105.89 BUS3.1 144.21,102.3 142.24,100.33 120.27,100.33 112.14,92.2 110.24,92.2 106.3,88.27 FUSE_BUS_3.R2 FUSE_BUS_3.R1
12V_F4  (via drill 1.14)
  Top 1.778: BUS4.1 128.17,98.04 v128.14,98.04
  Bottom 1.778: BUS4.1 135.64,105.51 135.64,111.38 129.44,117.57 X8.4 | FUSE_BUS_4.R1 FUSE_BUS_4.R2 117.03,89.47 117.03,93.79 121.28,98.04 v128.14,98.04
12VSUPPLY_BRB  (via drill 1.14)
  Top 2.032: v50.04,131.06 50.04,122.17 46.48,118.62 33.1,118.62 | X4.2 33.1,118.62 | 33.1,118.62 29.29,114.81 v29.21,114.81
  Bottom 1.778: X4.2 28,123.72 | SHUTDWN_FUSE.R1 SHUTDWN_FUSE.R2 13.46,94.49 21.46,94.49 29.17,102.19 29.17,102.91
  Bottom 2.032: FH_FUSE.R1 FH_FUSE.R2 46.1,135 v50.04,131.06 | v29.21,114.81 27.43,113.03 27.43,104.65 29.17,102.91 X1.1
12VSUPPLY_BRB1  (via drill 1.14)
  Top 2.032: v139.83,131.06 139.83,122.17 136.27,118.62 122.89,118.62 | X8.2 122.89,118.62 | 122.89,118.62 119.08,114.81 v119,114.81
  Bottom 1.778: X8.2 117.79,123.72 | SHUTDWN_FUSE1.R1 SHUTDWN_FUSE1.R2 103.25,94.49 111.25,94.49 118.95,102.19 118.95,102.91
  Bottom 2.032: FH_FUSE1.R1 FH_FUSE1.R2 135.89,135 v139.83,131.06 | v119,114.81 117.22,113.03 117.22,104.65 118.95,102.91 X6.1
12VSUPPLY_FSAE
  Top 2.032: X4.1 20.77,123.75 16.76,127.76 16.76,132.74 FSAE_FUSE.R1
  Bottom 2.032: FSAE_FUSE.R2 FSAE_FUSE.R1
12VSUPPLY_FSAE1
  Top 2.032: X8.1 110.56,123.75 106.55,127.76 106.55,132.74 FSAE_FUSE1.R1
  Bottom 2.032: FSAE_FUSE1.R2 FSAE_FUSE1.R1
12VSUPPLY_READ
  Bottom 0.406: R8.1 13.84,59.06 13.84,59.82 13.34,60.33 9.4,60.33 8.88,59.81 R7.2 U$3.A3
12VSUPPLY_READ1
  Bottom 0.406: R41.1 103.63,59.06 103.63,59.82 103.12,60.33 99.19,60.33 98.67,59.81 R40.2 U$13.A3
+3V3  (via drill 0.45)
  Top 0.61: U$26.P$8 203.89,89.23 202.69,90.42 195.83,90.42 v195.07,91.19
  Bottom 0.406: U$26.P$8 208.52,87.87 210.69,90.04 U$27.1
  Bottom 0.61: U$28.4 U$28.2 C14.1 R57.1 v195.06,91.19 v195.07,91.19
+5V  (via drill 0.45, 0.6)
  Top 0.406: REG.3 9.13,45.96 v9.91,46.74 | 17.01,17.28 R20.1 18.53,17.28 v18.67,17.14
  Top 0.61: REG.3 7.87,42.79 C2.2 5.72,37.6 U$3.VIN | R13.1 54.36,31.12 54.36,32.13 53.85,32.64 | 53.85,32.64 38.1,32.64 | 38.1,32.64 36.58,31.11 R12.2 | 38.1,32.64 37.21,33.53 v23.62,33.53 | 53.85,32.64 v59.94,32.64
  Bottom 0.406: BOARD_TEMP.1 10.8,45.84 v9.91,46.74 9.4,47.24 CAN_TRANSCEIVER.3
  Bottom 0.61: v23.62,33.53 20.45,30.35 20.45,22.48 18.67,20.7 v18.67,17.14 14.99,17.14 6.22,25.91 6.22,34.29 U$3.VIN | v59.94,32.64 61.47,34.16 U$8.6 65.53,34.16 67.06,32.64 67.06,23.24 70.23,20.07 70.23,17.4 69.6,16.76 U$9.6
+5V1  (via drill 0.45, 0.6)
  Top 0.406: REG3.3 98.92,45.96 v99.69,46.74 | 106.8,17.28 R47.1 108.32,17.28 v108.46,17.14
  Top 0.61: REG3.3 97.66,42.79 C8.2 95.51,37.6 U$13.VIN | R32.1 144.15,31.12 144.15,32.13 143.64,32.64 | 143.64,32.64 127.89,32.64 | 127.89,32.64 126.36,31.11 R31.2 | 127.89,32.64 127,33.53 v113.41,33.53 | 143.64,32.64 v149.73,32.64
  Bottom 0.406: BOARD_TEMP1.1 100.59,45.84 v99.69,46.74 99.19,47.24 CAN_TRANSCEIVER1.3
  Bottom 0.61: v113.41,33.53 110.24,30.35 110.24,22.48 108.46,20.7 v108.46,17.14 104.78,17.14 96.01,25.91 96.01,34.29 U$13.VIN | v149.73,32.64 151.26,34.16 U$21.6 155.32,34.16 156.84,32.64 156.84,23.24 160.02,20.07 160.02,17.4 159.38,16.76 U$22.6
+5V2  (via drill 0.45)
  Top 0.406: 5VREG.3 190.35,117.2 191.26,118.11 C13.1 191.01,119.14 v191.01,124.46 195.58,124.46 v196.09,123.95 | LED32.A 226.53,105.44 U$24.VIN
  Top 0.61: 5VREG.3 190.36,116.08 v193.04,116.08
  Bottom 0.406: R56.2 192.28,125.73 v191.01,124.46 | R60.2 R59.2 R58.2 240.55,122.69 241.05,123.19 242.06,123.19 243.33,121.92 243.33,108.97 | U$23.19 215.9,119.89 213.61,119.89 212.6,118.87 U$23.21 210.57,120.14 209.3,120.14 208.79,120.65 208.79,123.19 208.03,123.95 v196.09,123.95 | U$27.14 215.65,102.87 | 215.65,102.87 221.49,102.87 U$24.VIN 227.59,104.39 R61.2 R62.2 R63.2 240.53,104.39 243.33,107.19 243.33,108.97 | 215.65,102.87 209.55,102.87 208.53,103.89 187.2,103.89 185.8,105.28 | U$29.5 197.09,112.52 189.74,112.52 189.61,112.65 | IC1.14 241.81,110.49 243.33,108.97
  Bottom 0.61: v193.04,116.08 189.61,112.65 189.61,109.09 185.8,105.28 183.13,102.62 183.13,92.46 184.15,91.44 188.47,91.44 189.98,92.95 U$28.3
+12V  (via drill 0.45, 0.6, 1.14)
  Top 0.406: v13.21,57.4 16.26,57.4 16.76,57.91 16.76,58.04
  Top 0.61: REG2.1 70.6,99.47 C5.2 | v16.26,106.55 18.24,106.55 U$1.P | GPIO_SSR1.4 11.3,28.83 12.57,27.56 v15.88,27.56 | v25.78,27.56 21.59,27.56 20.32,28.83 GPIO_SSR2.4 19.18,28.88 v19.18,30.23 21.46,32.51 21.46,44.58 | v28.57,30.1 28.57,28.88 IMD_SSR.4 29.72,28.83 30.99,27.56 39.38,27.56 39.71,27.89 46,27.89 BMS_SSR.4 | C5.2 70.61,97.53 70.61,90.04 v81.15,79.5 | v63.93,97.66 70.48,97.66 C5.2 | FUSE_BUS_2.L1 22.48,78.21 22.48,76.07 30.86,67.69 BRAKE_LIGHT_SSR.6 | 21.46,44.58 20.95,45.09 17.41,45.09 C1.2 16.37,44.04 REG.1 | v16.76,55.63 16.76,58.04 16.76,70.61 18.41,72.26 v18.41,72.9 | v21.97,47.37 21.97,45.09 21.46,44.58 | v52.45,93.47 52.45,87.25 44.58,79.38 36.32,79.38 35.31,80.39 35.31,82.55 33.78,84.07 v31.5,84.07
  Top 2.032: FUSE_BUS_1.L1 FUSE_BUS_1.L2 16.51,83.57 19.56,86.61 19.56,90.55 22.48,93.47 22.48,99.06 21.29,100.25 U$1.P 22.86,105.08 22.86,110.87 13.21,120.52 v13.21,129.54
  Bottom 0.406: R7.1 11.56,59.05 v13.21,57.4
  Bottom 0.61: INVERTER_SSR.4 10.92,104.9 12.57,106.55 v16.26,106.55 | v15.88,27.56 16.51,27.56 v19.18,30.23 | v25.78,27.56 26.04,27.56 v28.57,30.1 | v81.15,79.5 PUMP_SSR.4 77.47,77.64 77.47,67.56 80.77,64.26 80.77,62.41 FAN_SSR.4 | v16.76,55.63 16.76,51.31 17.91,50.16 21.46,50.16 21.97,49.66 v21.97,47.37 | v52.45,93.47 56.64,97.66 v63.93,97.66 | v18.41,72.9 19.18,72.9 22.5,76.22 FUSE_BUS_2.L1 | v31.5,84.07 25.91,78.49 FUSE_BUS_2.L2
  Bottom 1.778: 13.08,78.23 FUSE_BUS_1.L1
  Bottom 2.032: FH_FUSE.L2 FH_FUSE.L1 36.04,138.43 FSAE_FUSE.L2 FSAE_FUSE.L1 18.69,135.03 v13.21,129.54 | FUSE_BUS_2.L2 FUSE_BUS_2.L1 FUSE_BUS_1.L2 13.08,78.23
+12V1  (via drill 0.45, 0.6, 1.14)
  Top 0.406: v103,57.4 106.05,57.4 106.55,57.91 106.55,58.04
  Top 0.61: REG5.1 160.39,99.47 C11.2 | v106.05,106.55 108.03,106.55 U$12.P | GPIO_SSR4.4 101.09,28.83 102.36,27.56 v105.66,27.56 | v115.57,27.56 111.38,27.56 110.11,28.83 GPIO_SSR3.4 108.97,28.88 v108.97,30.23 111.25,32.51 111.25,44.58 | v118.36,30.1 118.36,28.88 IMD_SSR1.4 119.51,28.83 120.78,27.56 129.17,27.56 129.5,27.89 135.79,27.89 BMS_SSR1.4 | C11.2 160.4,97.53 160.4,90.04 v170.94,79.5 | v153.72,97.66 160.26,97.66 C11.2 | FUSE_BUS_4.L1 112.27,78.21 112.27,76.07 120.65,67.69 BRAKE_LIGHT_SSR1.6 | 111.25,44.58 110.74,45.09 107.2,45.09 C7.2 106.16,44.04 REG3.1 | v106.55,55.63 106.55,58.04 106.55,70.61 108.2,72.26 v108.2,72.9 | v111.76,47.37 111.76,45.09 111.25,44.58 | v142.24,93.47 142.24,87.25 134.37,79.38 126.11,79.38 125.09,80.39 125.09,82.55 123.57,84.07 v121.28,84.07
  Top 2.032: FUSE_BUS_3.L1 FUSE_BUS_3.L2 106.3,83.57 109.35,86.61 109.35,90.55 112.27,93.47 112.27,99.06 111.07,100.25 U$12.P 112.65,105.08 112.65,110.87 103,120.52 v103,129.54
  Bottom 0.406: R40.1 101.35,59.05 v103,57.4
  Bottom 0.61: INVERTER_SSR1.4 100.71,104.9 102.36,106.55 v106.05,106.55 | v105.66,27.56 106.3,27.56 v108.97,30.23 | v115.57,27.56 115.82,27.56 v118.36,30.1 | v170.94,79.5 PUMP_SSR1.4 167.26,77.64 167.26,67.56 170.56,64.26 170.56,62.41 FAN_SSR1.4 | v106.55,55.63 106.55,51.31 107.7,50.16 111.25,50.16 111.76,49.66 v111.76,47.37 | v142.24,93.47 146.43,97.66 v153.72,97.66 | v108.2,72.9 108.97,72.9 112.29,76.22 FUSE_BUS_4.L1 | v121.28,84.07 115.7,78.49 FUSE_BUS_4.L2
  Bottom 1.778: 102.87,78.23 FUSE_BUS_3.L1
  Bottom 2.032: FH_FUSE1.L2 FH_FUSE1.L1 125.83,138.43 FSAE_FUSE1.L2 FSAE_FUSE1.L1 108.48,135.03 v103,129.54 | FUSE_BUS_4.L2 FUSE_BUS_4.L1 FUSE_BUS_3.L2 102.87,78.23
+12V2
  Top 0.61: 5VREG.1 190.11,111.76 186.94,111.76
  Top 1.27: STRIP2.1 188.47,99.06 186.94,100.58 186.94,111.76 186.94,128.39 CN1.PWR 197.73,129.91 U$25.1 213.87,137.16 STRIP1.1
A4  (via drill 0.35)
  Top 0.508: v208.79,50.04 v201.17,50.04 201.17,70.36 R68.P$2
  Bottom 0.508: U$31.A0 v208.79,50.04 | v201.17,50.04 GPIO4.1 | R67.P$1 183.39,72.9 R68.P$2
A5  (via drill 0.35)
  Top 0.508: v208.79,47.5 v201.17,47.5
  Bottom 0.508: U$31.A1 v208.79,47.5 | v201.17,47.5 GPIO4.2
A8  (via drill 0.35)
  Top 0.508: v208.79,44.96 v201.17,44.96
  Bottom 0.508: U$31.A2 v208.79,44.96 | v201.17,44.96 GPIO4.3
A9  (via drill 0.35)
  Top 0.508: v208.79,42.42 v201.17,42.42
  Bottom 0.508: U$31.A3 v208.79,42.42 | v201.17,42.42 GPIO4.4
A10  (via drill 0.35)
  Top 0.508: v208.79,39.88 v201.17,39.88
  Bottom 0.508: U$31.A6 211.33,34.8 211.33,39.88 v208.79,39.88 | v201.17,39.88 GPIO4.5
A11  (via drill 0.35)
  Top 0.508: v208.79,37.34 v201.17,37.34
  Bottom 0.508: v208.79,37.34 208.79,32.26 U$31.A7 | v201.17,37.34 GPIO4.6
AREF1  (via drill 0.35)
  Top 0.508: v208.79,52.58 v203.71,52.58
  Bottom 0.508: U$31.AREF v208.79,52.58 | v203.71,52.58 203.71,27.18 201.17,24.64 POWER1.2
BLANK
  Top 0.406: U$24.D10 196.6,120.14 205.74,120.14 207.52,118.36 U$23.23
  Bottom 0.406: U$24.D10 194.82,125.72 R56.1
BMS_COIL_PWR  (via drill 0.45, 0.6)
  Top 0.406: BMS_LATCH_SSR.3 61.34,31.29 v61.34,48.13
  Top 0.61: R17.1 32.77,73.91 IMD_SHUTDOWN1.4 34.92,75.82 45.47,75.82 48.32,72.96 v49.59,72.96
  Bottom 0.406: v61.34,48.13 61.34,48.22 60.89,48.68 60.89,75.39 D5.C
  Bottom 0.61: D5.C IMD_SHUTDOWN1.COIL- v49.59,72.96
BMS_COIL_PWR1  (via drill 0.45, 0.6)
  Top 0.406: BMS_LATCH_SSR1.3 151.13,31.29 v151.13,48.13
  Top 0.61: R44.1 122.56,73.91 IMD_SHUTDOWN3.4 124.71,75.82 135.25,75.82 138.11,72.96 v139.38,72.96
  Bottom 0.406: v151.13,48.13 151.13,48.22 150.68,48.68 150.68,75.39 D13.C
  Bottom 0.61: D13.C IMD_SHUTDOWN3.COIL- v139.38,72.96
BMS_OK  (via drill 0.45, 0.6)
  Top 0.406: v20.32,70.99 28.45,62.87 41.27,62.87 42.55,61.59 42.55,60.07 43.37,59.24 46.8,59.24 47.51,58.54 R19.1
  Top 0.61: X2.2 54.74,65.11 54.74,60.45 52.2,57.91 49.91,57.91 | 49.91,57.91 R19.1 | v43.94,29.34 44.97,30.36 R11.2 | v46.48,53.72 45.09,52.32 v45.09,40.51 | v48.01,56.01 49.91,57.91
  Bottom 0.406: D2.A 7.36,70.99 v20.32,70.99
  Bottom 0.61: X3.2 39.65,22.89 43.94,27.18 v43.94,29.34 45.09,30.48 v45.09,40.51 | v46.48,53.72 48.01,55.24 v48.01,56.01
BMS_OK1  (via drill 0.45, 0.6)
  Top 0.406: v110.11,70.99 118.24,62.87 131.06,62.87 132.33,61.59 132.33,60.07 133.16,59.24 136.59,59.24 137.3,58.54 R45.1
  Top 0.61: X5.2 144.53,65.11 144.53,60.45 141.99,57.91 139.7,57.91 | 139.7,57.91 R45.1 | v133.73,29.34 134.76,30.36 R26.2 | v136.27,53.72 134.87,52.32 v134.87,40.51 | v137.79,56.01 139.7,57.91
  Bottom 0.406: D10.A 97.14,70.99 v110.11,70.99
  Bottom 0.61: X7.2 129.44,22.89 133.73,27.18 v133.73,29.34 134.87,30.48 v134.87,40.51 | v136.27,53.72 137.79,55.24 v137.79,56.01
BMS_OK_READ
  Bottom 0.406: R4.1 13.83,64.91 13.34,65.41 9.4,65.41 8.88,64.89 R3.2 U$3.A1
BMS_OK_READ1
  Bottom 0.406: R37.1 103.62,64.91 103.12,65.41 99.19,65.41 98.67,64.89 R36.2 U$13.A1
BMS_PWR_STEP  (via drill 0.6)
  Top 0.61: BMS_LATCH_SSR.4 54.61,28.83 v53.72,27.94 | v47.75,24.89 46.94,25.7 BMS_SSR.3 | v49.4,44.58 v49.4,52.07 | IMD_SHUTDOWN1.3 39.93,71.75 47.62,71.75 v50.35,69.03
  Bottom 0.61: v47.75,24.89 50.8,27.94 v53.72,27.94 54.74,28.96 54.74,39.24 v49.4,44.58 | v50.35,69.03 53.91,69.03 54.86,68.07 54.86,57.53 v49.4,52.07
BMS_PWR_STEP1  (via drill 0.6)
  Top 0.61: BMS_LATCH_SSR1.4 144.4,28.83 v143.51,27.94 | v137.54,24.89 136.73,25.7 BMS_SSR1.3 | v139.19,44.58 v139.19,52.07 | IMD_SHUTDOWN3.3 129.72,71.75 137.41,71.75 v140.14,69.03
  Bottom 0.61: v137.54,24.89 140.59,27.94 v143.51,27.94 144.53,28.96 144.53,39.24 v139.19,44.58 | v140.14,69.03 143.7,69.03 144.65,68.07 144.65,57.53 v139.19,52.07
BRAKE_LIGHT
  Bottom 0.61: BRAKE_LIGHT_SSR.5 38.61,66.67 43.64,61.64 X2.4 35.58,48.72 35.58,28.04 27.97,20.43 X3.4
BRAKE_LIGHT1
  Bottom 0.61: BRAKE_LIGHT_SSR1.5 128.4,66.67 133.43,61.64 X5.4 125.37,48.72 125.37,28.04 117.76,20.43 X7.4
BRAKE_LIGHT_CTRL  (via drill 0.45)
  Top 0.406: U$3.D12 20.98,69.22 28.07,62.13 34.14,62.13 v34.54,61.72
  Bottom 0.406: v34.54,61.72 34.54,63.64 R10.2
BRAKE_LIGHT_CTRL1  (via drill 0.45)
  Top 0.406: U$13.D12 110.77,69.22 117.86,62.13 123.93,62.13 v124.33,61.72
  Bottom 0.406: v124.33,61.72 124.33,63.64 R25.2
CANH  (via drill 0.45)
  Top 0.406: BUS1.4 48.74,106.93 40.39,106.93 39.05,108.27 BUS2.4 | v30.07,105.21 27.38,102.51 27.38,97.74 25.25,95.61 v25.25,91.16 | v15.49,56.13 15.24,56.39 12.83,56.39 11.94,57.28 11.94,58.42 15.37,61.85 15.37,71.37 v16.89,72.9 | v20.45,83.44 v20.45,76.45
  Bottom 0.406: X4.8 36.7,126.85 36.7,114.3 | 36.7,114.3 39.05,111.95 BUS2.4 | CAN_TRANSCEIVER.7 10.67,53.72 11.3,53.09 14.09,53.09 R15.1 15.49,54.49 v15.49,56.13 | 36.7,114.3 36.7,108.84 33.07,105.21 v30.07,105.21 | v25.25,91.16 24.18,90.09 21.51,90.09 20.45,89.03 v20.45,83.44 | v20.45,76.45 v16.89,72.9
CANH1  (via drill 0.45)
  Top 0.406: BUS3.4 138.53,106.93 130.18,106.93 128.84,108.27 BUS4.4 | v119.86,105.21 117.17,102.51 117.17,97.74 115.04,95.61 v115.04,91.16 | v105.28,56.13 105.03,56.39 102.62,56.39 101.73,57.28 101.73,58.42 105.16,61.85 105.16,71.37 v106.68,72.9 | v110.24,83.44 v110.24,76.45
  Bottom 0.406: X8.8 126.49,126.85 126.49,114.3 | 126.49,114.3 128.84,111.95 BUS4.4 | CAN_TRANSCEIVER1.7 100.46,53.72 101.09,53.09 103.88,53.09 R34.1 105.28,54.49 v105.28,56.13 | 126.49,114.3 126.49,108.84 122.86,105.21 v119.86,105.21 | v115.04,91.16 113.97,90.09 111.3,90.09 110.24,89.03 v110.24,83.44 | v110.24,76.45 v106.68,72.9
CANL  (via drill 0.45)
  Top 0.406: v29.67,106.32 26.57,103.23 26.57,98.09 24.28,95.81 v24.28,91.77 | v10.31,57.45 10.31,57.94 14.48,62.1 14.48,72.01 v15.37,72.9 | X4.7 25.15,126.92 25.15,115.82 28.45,112.52 32.51,112.52 | 32.51,112.52 34.34,110.69 v34.34,108.92 | BUS2.3 39.14,112.52 | 39.14,112.52 32.51,112.52 | 39.14,112.52 50.32,112.52 BUS1.3 | v19.05,83.44 v19.05,76.58
  Bottom 0.406: v10.31,57.45 9.4,56.54 CAN_TRANSCEIVER.6 9.4,53.59 10.67,52.32 12.7,52.32 13.85,51.17 R15.2 | v29.67,106.32 33.02,106.32 34.34,107.64 v34.34,108.92 | v24.28,91.77 23.27,90.75 21.18,90.75 19.68,89.26 19.68,84.45 19.05,83.82 v19.05,83.44 | v19.05,76.58 v15.37,72.9
CANL1  (via drill 0.45)
  Top 0.406: v119.46,106.32 116.36,103.23 116.36,98.09 114.07,95.81 v114.07,91.77 | v100.1,57.45 100.1,57.94 104.27,62.1 104.27,72.01 v105.16,72.9 | X8.7 114.94,126.92 114.94,115.82 118.24,112.52 122.3,112.52 | 122.3,112.52 124.13,110.69 v124.13,108.92 | BUS4.3 128.93,112.52 | 128.93,112.52 122.3,112.52 | 128.93,112.52 140.1,112.52 BUS3.3 | v108.84,83.44 v108.84,76.58
  Bottom 0.406: v100.1,57.45 99.19,56.54 CAN_TRANSCEIVER1.6 99.19,53.59 100.46,52.32 102.49,52.32 103.64,51.17 R34.2 | v119.46,106.32 122.81,106.32 124.13,107.64 v124.13,108.92 | v114.07,91.77 113.06,90.75 110.97,90.75 109.47,89.26 109.47,84.45 108.84,83.82 v108.84,83.44 | v108.84,76.58 v105.16,72.9
D0(RX)1
  Bottom 0.508: U$31.D0(RX) 224.03,19.56 197.36,19.56 196.09,20.83 196.09,23.37 201.17,28.45 201.17,34.8 GPIO4.7
D1  (via drill 0.35)
  Top 0.508: v197.36,57.66 v183.39,57.66
  Bottom 0.508: U$31.D13 v197.36,57.66 | v183.39,57.66 GPIO3.8
D1(TX)1
  Bottom 0.508: U$31.D1(TX) 225.3,18.29 196.09,18.29 193.55,20.83 193.55,24.64 198.63,29.72 GPIO4.8
D2
  Bottom 0.508: U$31.D12 226.57,57.66 226.57,67.82 187.2,67.82 187.2,47.5 GPIO3.7
D3
  Bottom 0.508: U$31.D11 225.3,55.12 225.3,66.55 188.47,66.55 188.47,44.96 GPIO3.6
D4
  Bottom 0.508: U$31.D10 224.03,52.58 224.03,65.28 189.74,65.28 189.74,42.42 GPIO3.5
D5
  Bottom 0.508: U$31.D9 222.76,50.04 222.76,64.01 191.01,64.01 191.01,39.88 GPIO3.4
D14
  Bottom 0.508: U$31.D8 221.49,47.5 221.49,62.74 192.28,62.74 192.28,37.34 GPIO3.3
D15
  Bottom 0.508: U$31.D7 220.22,44.96 220.22,61.47 193.55,61.47 193.55,34.8 GPIO3.2
D16
  Bottom 0.508: U$31.D6 218.95,42.42 218.95,60.2 194.82,60.2 194.82,32.26 GPIO3.1
DRIVE1
  Bottom 0.508: U$31.D4 R66.P$1
ESC3
  Bottom 0.508: U$31.D3 234.19,34.8 240.54,41.15 ESC3.2
ESC4
  Bottom 0.508: U$31.D5 231.65,39.88 240.54,48.77 ESC4.2
FAN1-
  Top 1.778: U$7.P 64.77,60.58 64.77,41.78 74.76,31.8 U$4.2 74.76,22.05 62.87,10.16 35.94,10.16 33.81,12.29 X3.8
FAN1-1
  Top 1.778: U$18.P 154.56,60.58 154.56,41.78 164.55,31.8 U$15.2 164.55,22.05 152.65,10.16 125.73,10.16 123.6,12.29 X7.8
FAN2-
  Top 1.778: X3.9 37.4,4.32 71.75,4.32 74.76,7.32 U$5.2
FAN2-1
  Top 1.778: X7.9 127.19,4.32 161.54,4.32 164.55,7.32 U$16.2
GND  (via drill 0.45, 0.6)
  Top 0.406: R22.1 R23.1 75.18,126.88 v76.83,125.22 | v76.83,122.56 78.7,120.69 C3.2 | v69.22,113.16 REG1.1 | REG.2 11.43,45.59 v12.32,46.48 | LED6.C v25.02,110.74 | v13.84,54.74 11.18,52.07 v9.65,52.07 | 33.51,107.04 33.38,107.04 29.84,103.5 LED5.C 28.32,94.78 28.32,83.98 LED7.C | 12.45,46.61 v12.32,46.48 | C1.1 v12.33,46.49 v12.32,46.48
  Top 0.61: REG1.1 71.42,110.33 C4.1 71.86,108.84 REG2.4 | REG2.4 REG2.2 73.91,97.54 | REG.2 REG.4 v11.43,35.05 | C2.1 8.37,35.05 v11.43,35.05 | v25.02,110.74 29.8,110.74 X1.2 | 12.7,22.48 18.67,22.48 | 12.7,22.48 11.34,22.48 LED14.C 11.54,25.48 v11.54,27.16 | 18.67,22.48 25.78,22.48 | 43.94,22.48 25.78,22.48 | 43.94,22.48 44.99,23.53 LED3.C | 25.78,22.48 26.58,23.27 LED9.C | LED15.C 19.21,23.02 18.67,22.48 | LED8.C 14.86,20.32 12.7,22.48 | 59.05,86.88 R27.2 68.2,86.88 U$6.1 | 59.05,86.88 IMD_SHUTDOWN.COIL+ 60.2,90.3 60.2,97.92 57.67,100.44 | 59.05,86.88 59.94,85.98 59.94,75.31 58.42,73.79 IMD_SHUTDOWN1.COIL+ 57.91,72.26 59.94,70.23 | 62.67,68.02 U$7.1 | 62.67,68.02 R28.2 | 73.91,97.54 C6.1 | 73.91,97.54 C5.1 | BUS1.2 52.7,100.44 57.67,100.44 | 57.67,100.44 XB.10 67.57,100.44 REG2.4 | S1.B2 S1.B1 48.01,54.19 46.45,55.75 R18.2 45.46,55.77 R19.2 41.56,57.91 LED4.C | S1.B2 59.35,55.16 59.94,55.75 59.94,70.23 | 61.34,26.16 57.66,22.48 43.94,22.48 | v11.43,35.05 11.43,30.23 v11.56,30.1 | 61.34,26.16 67.31,26.16 v70.23,23.24 | S1.B2 60.11,54.19 62.74,51.56 62.74,27.56 61.34,26.16 | 59.94,70.23 62.16,68.02 62.67,68.02
  Top 2.032: BUS1.2 47.73,105.41 41.54,105.41 BUS2.2 37.63,102.91 33.51,107.04 X1.2
  Bottom 0.406: v76.83,125.22 v76.83,122.56 76.83,120.78 v69.22,113.16 | R9.1 12.32,42.16 v12.32,46.48 10.67,48.13 CAN_TRANSCEIVER.2 10.67,51.05 v9.65,52.07 | R2.2 R4.2 R6.2 R8.2 15.88,58.42 12.63,55.18 | 12.63,55.18 CAN_TRANSCEIVER.8 | 12.63,55.18 13.07,54.74 v13.84,54.74
  Bottom 0.61: D4.A 19.18,106.82 U$1.2 23.77,109.5 v25.02,110.74 | U$6.1 70.25,84.83 D7.A | U$7.1 70.22,66.11 D8.A | D6.A IMD_SHUTDOWN.COIL+ | D5.A IMD_SHUTDOWN1.COIL+ | U$3.AGND 8,35.05 v11.43,35.05 18.41,35.05 U$3.GND | U$8.3 70.61,34.16 71.37,33.4 71.37,31.88 70.23,30.73 v70.23,23.24 70.23,22.1 71.5,20.83 71.5,17.53 72.26,16.76 U$9.3 | v11.54,27.16 11.54,30.08 v11.56,30.1
  Bottom 1.778: 32.13,122.07 X4.3
  Bottom 2.032: 32.13,122.07 X1.2
  Bottom 2.286: X4.6 17.61,129.75 13.34,125.48 13.34,121.79 15.49,119.63 29.69,119.63 X4.3
GND1
  Bottom 1.778: U$4.3 80.51,23.88 80.51,23.62 | U$2.3 80.21,39.88 80.51,39.88 | U$5.3 79.57,7.86 79.57,7.18
  Bottom 2.032: U$6.S 84.2,71.08 84.2,59.18 81.05,56.03 U$7.S
  Bottom 3.302: X3.10 31.69,4.19 76.58,4.19 79.57,7.18 80.51,8.12 80.51,23.62 80.51,39.88 U$7.S
GND2  (via drill 0.45, 0.6)
  Top 0.406: R49.1 R50.1 164.97,126.88 v166.62,125.22 | v166.62,122.56 168.49,120.69 C9.2 | v159,113.16 REG4.1 | REG3.2 101.22,45.59 v102.11,46.48 | LED21.C v114.81,110.74 | v103.63,54.74 100.97,52.07 v99.44,52.07 | 123.3,107.04 123.17,107.04 119.63,103.5 LED20.C 118.11,94.78 118.11,83.98 LED22.C | 102.23,46.61 v102.11,46.48 | C7.1 v102.12,46.49 v102.11,46.48
  Top 0.61: REG4.1 161.21,110.33 C10.1 161.65,108.84 REG5.4 | REG5.4 REG5.2 163.7,97.54 | REG3.2 REG3.4 v101.22,35.05 | C8.1 98.16,35.05 v101.22,35.05 | v114.81,110.74 119.59,110.74 X6.2 | 102.49,22.48 108.46,22.48 | 102.49,22.48 101.13,22.48 LED29.C 101.33,25.48 v101.33,27.16 | 108.46,22.48 115.57,22.48 | 133.73,22.48 115.57,22.48 | 133.73,22.48 134.78,23.53 LED18.C | 115.57,22.48 116.37,23.27 LED24.C | LED30.C 109,23.02 108.46,22.48 | LED23.C 104.65,20.32 102.49,22.48 | 148.84,86.88 R51.2 157.99,86.88 U$17.1 | 148.84,86.88 IMD_SHUTDOWN2.COIL+ 149.99,90.3 149.99,97.92 147.46,100.44 | 148.84,86.88 149.73,85.98 149.73,75.31 148.21,73.79 IMD_SHUTDOWN3.COIL+ 147.7,72.26 149.73,70.23 | 152.46,68.02 U$18.1 | 152.46,68.02 R52.2 | 163.7,97.54 C12.1 | 163.7,97.54 C11.1 | BUS3.2 142.49,100.44 147.46,100.44 | 147.46,100.44 XB1.10 157.36,100.44 REG5.4 | S2.B2 S2.B1 137.79,54.19 136.24,55.75 R46.2 135.25,55.77 R45.2 131.35,57.91 LED19.C | S2.B2 149.14,55.16 149.73,55.75 149.73,70.23 | 151.13,26.16 147.45,22.48 133.73,22.48 | v101.22,35.05 101.22,30.23 v101.35,30.1 | 151.13,26.16 157.1,26.16 v160.02,23.24 | S2.B2 149.9,54.19 152.53,51.56 152.53,27.56 151.13,26.16 | 149.73,70.23 151.95,68.02 152.46,68.02
  Top 2.032: BUS3.2 137.52,105.41 131.33,105.41 BUS4.2 127.42,102.91 123.3,107.04 X6.2
  Bottom 0.406: v166.62,125.22 v166.62,122.56 166.62,120.78 v159,113.16 | R42.1 102.11,42.16 v102.11,46.48 100.46,48.13 CAN_TRANSCEIVER1.2 100.46,51.05 v99.44,52.07 | R35.2 R37.2 R39.2 R41.2 105.66,58.42 102.42,55.18 | 102.42,55.18 CAN_TRANSCEIVER1.8 | 102.42,55.18 102.86,54.74 v103.63,54.74
  Bottom 0.61: D12.A 108.97,106.82 U$12.2 113.56,109.5 v114.81,110.74 | U$17.1 160.04,84.83 D15.A | U$18.1 160.01,66.11 D16.A | D14.A IMD_SHUTDOWN2.COIL+ | D13.A IMD_SHUTDOWN3.COIL+ | U$13.AGND 97.79,35.05 v101.22,35.05 108.2,35.05 U$13.GND | U$21.3 160.4,34.16 161.16,33.4 161.16,31.88 160.02,30.73 v160.02,23.24 160.02,22.1 161.29,20.83 161.29,17.53 162.05,16.76 U$22.3 | v101.33,27.16 101.33,30.08 v101.35,30.1
  Bottom 1.778: 121.92,122.07 X8.3